# Altium PCB CW308T_Si4010.PcbDoc
Units mil, origin at the board's own origin, x right, y up, seen from the top; angles counter-clockwise.
Board outline 2060 x 2580 mil, 2 copper layers (Top Layer, Bottom Layer); 23 components, 22 nets, 131 pads, 305 vias.
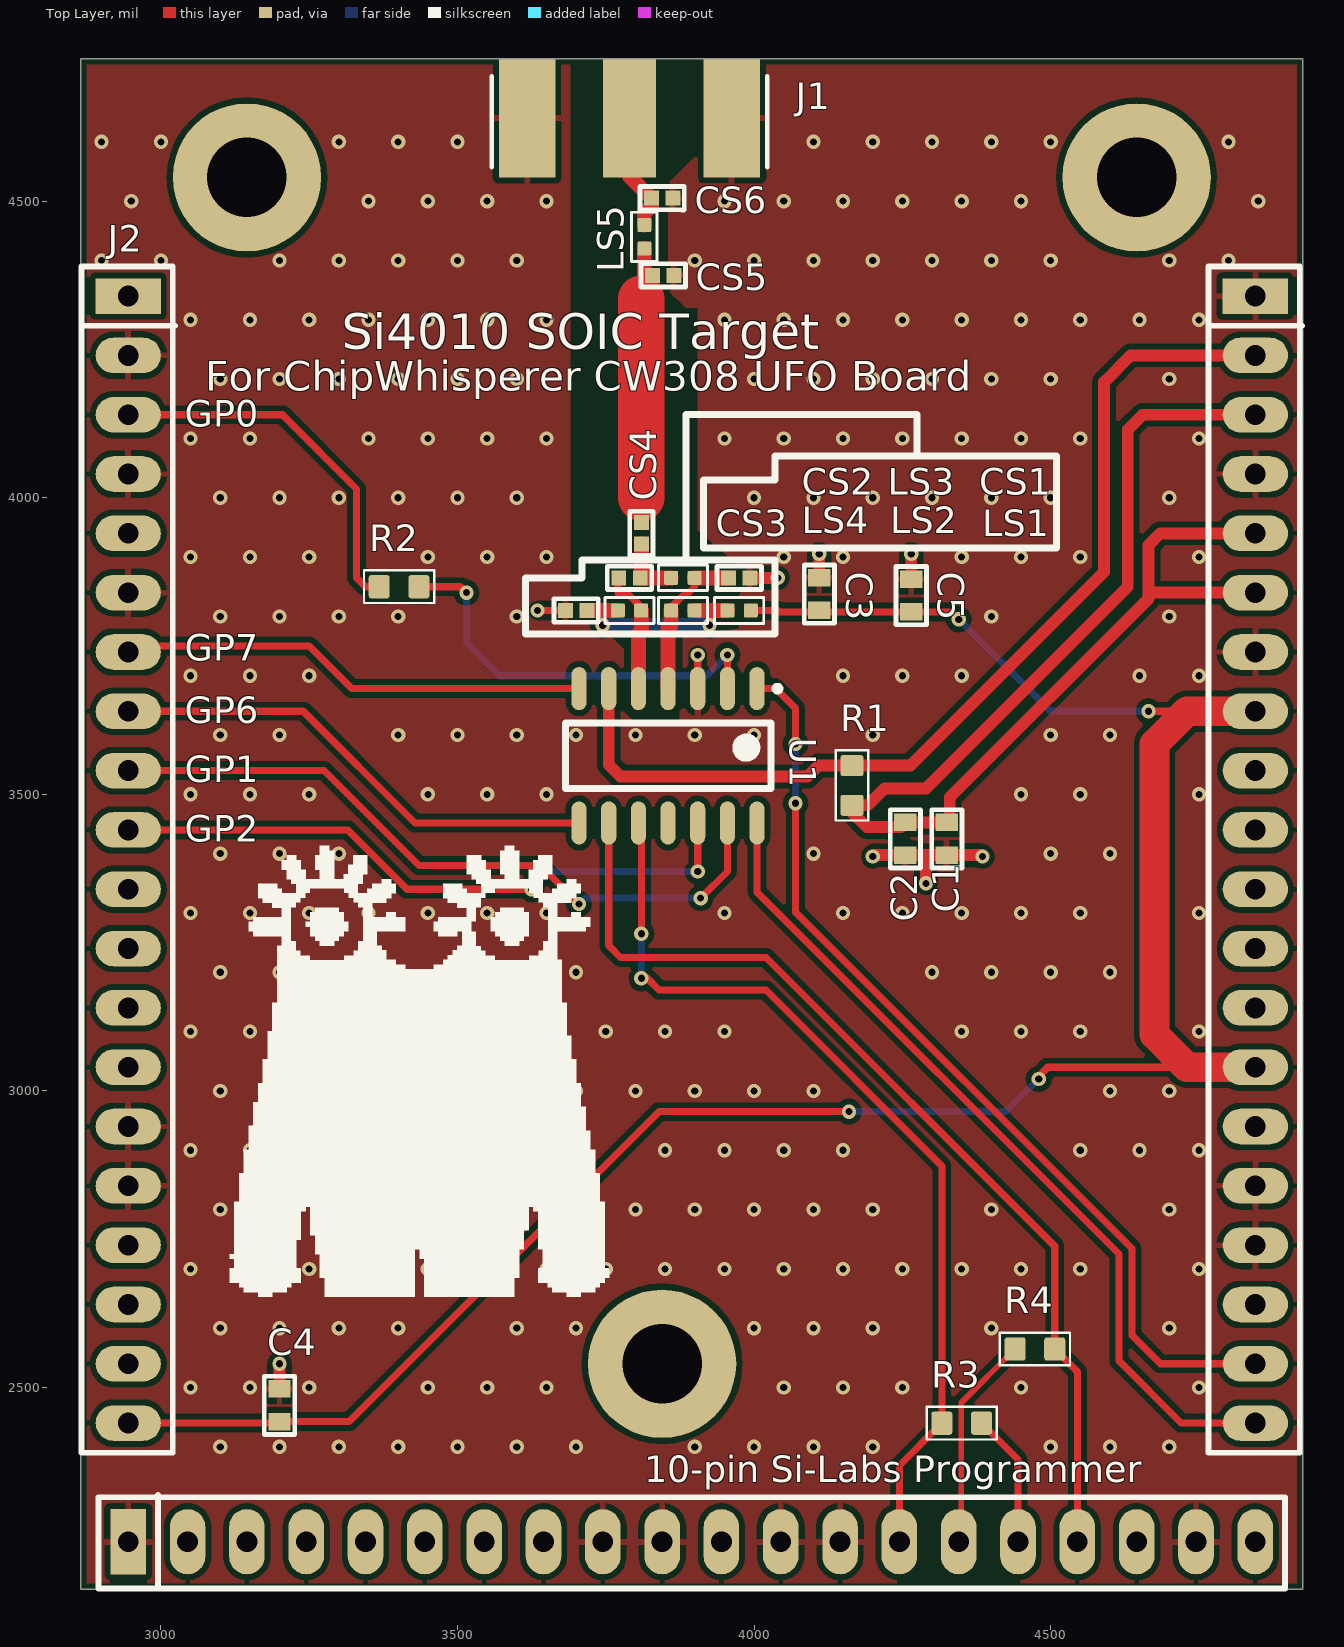
[diagram p0: Top Layer view]
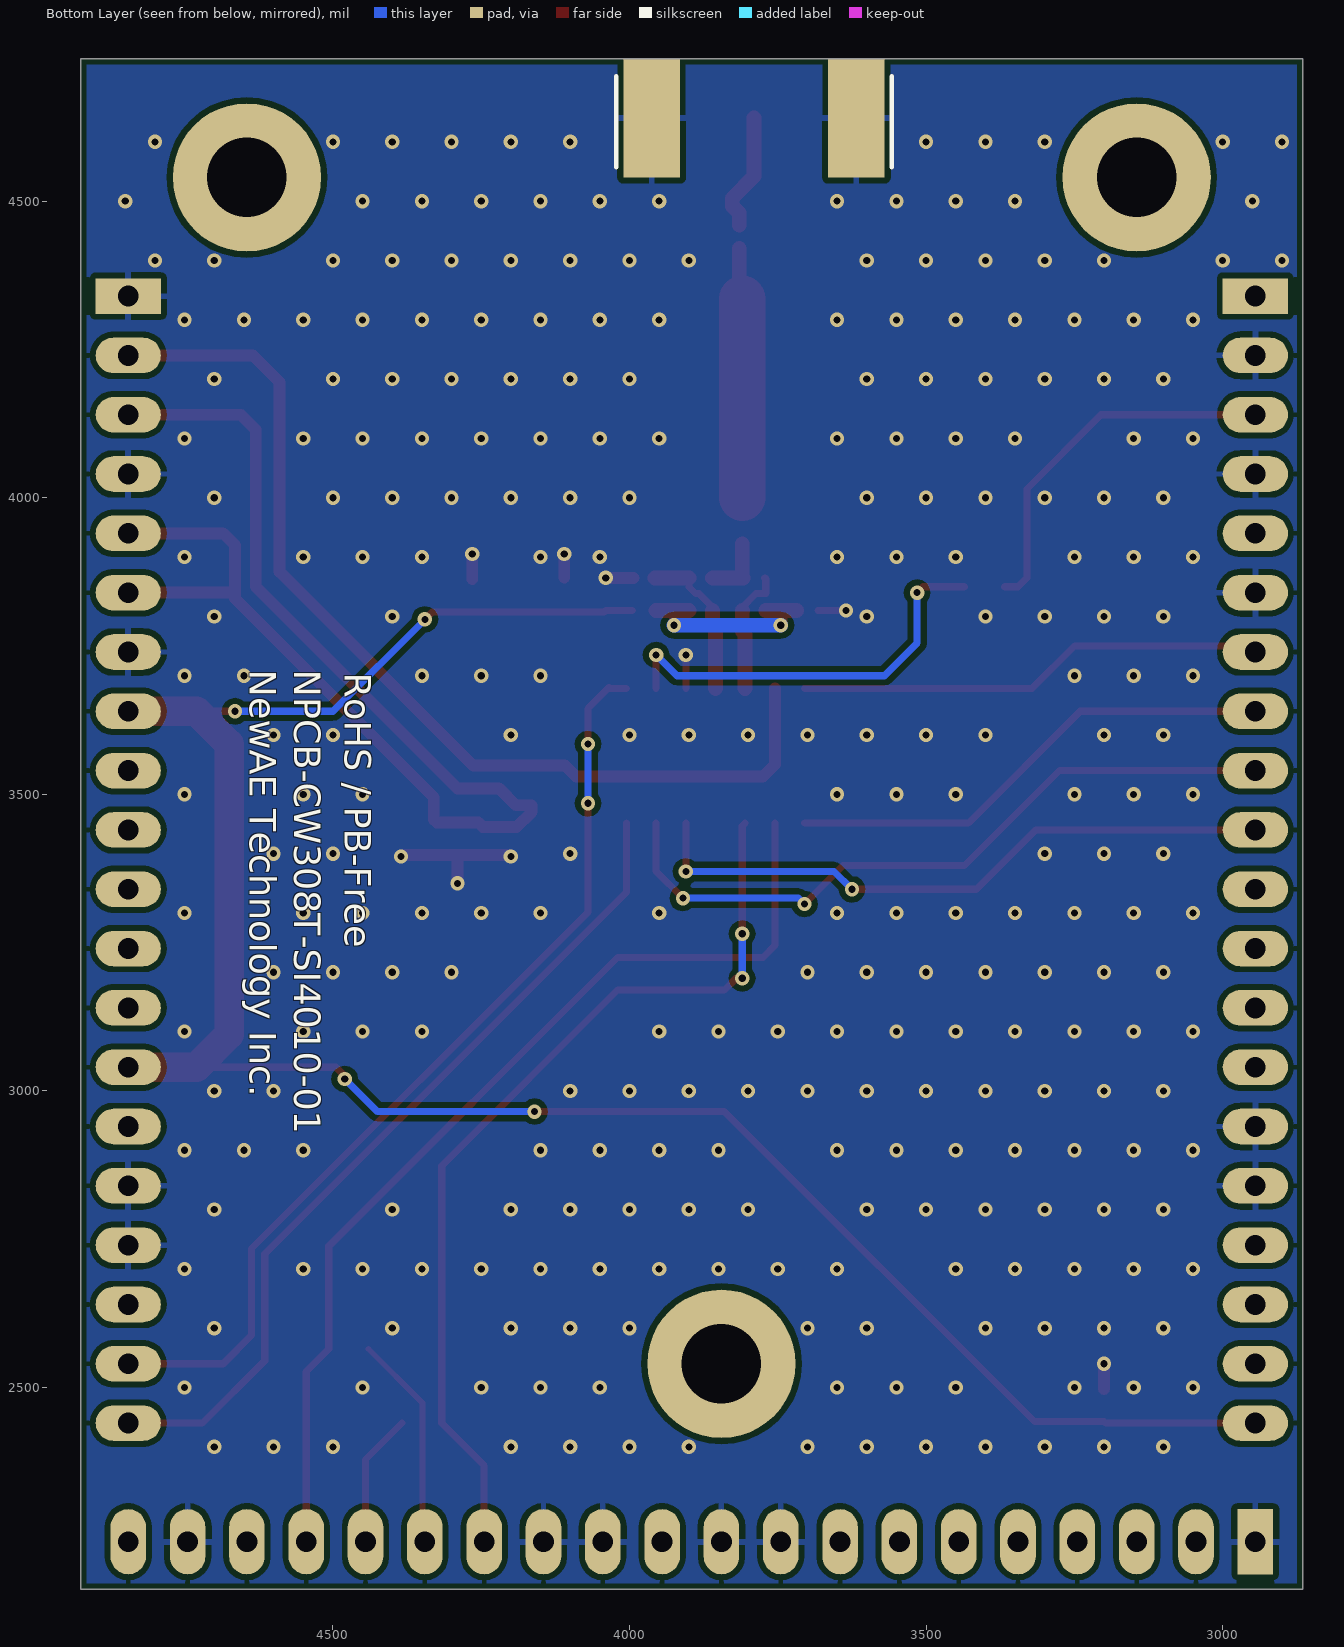
[diagram p1: Bottom Layer view, seen from below]

## Layer stack, top to bottom
Top Solder: solder mask 0.4, Solder Resist, Dk 3.5
Top Layer: signal copper 1.4
Dielectric 1: dielectric 12.6, FR-4, Dk 4.8
Bottom Layer: signal copper 1.4
Bottom Solder: solder mask 0.4, Solder Resist, Dk 3.5

## Board outline
2865,2160 2865,4740 4925,4740 4925,2160

## Design rules (kind name [scope] priority, off if disabled: settings)
BoardOutlineClearance [All] p1: gap=10 ignorepadtopadclearanceinfootprint=FALSE except(0: Arc-SplitContinuation Track-SplitContinuation SMDPad-SplitContinuation THPad-SplitContinuation Via-SplitContinuation Fill-SplitContinuation Poly-SplitContinuation Region-SplitContinuation Text-SplitContinuation)
Clearance [All] p1: gap=10 ignorepadtopadclearanceinfootprint=FALSE except(0: Arc-Hole Track-Hole SMDPad-Hole THPad-Hole Via-Hole Fill-Hole Poly-Hole Region-Hole Text-Hole)
PolygonConnect [All] p1: thpad.connectstyle=Relief thpad.reliefconductorwidth=10 thpad.reliefentries=4 thpad.polygonreliefangle="90 Angle" thpad.airgapwidth=10 smdpad.connectstyle=Relief smdpad.reliefconductorwidth=10 smdpad.reliefentries=4 smdpad.polygonreliefangle="90 Angle" smdpad.airgapwidth=10 via.connectstyle=Direct via.reliefconductorwidth=10 via.reliefentries=4 via.polygonreliefangle="90 Angle" via.airgapwidth=10
RoutingVias [All] p1: holewidth=12 width=24 viastyle="Through Hole" minholewidth=12 minwidth=24 maxholewidth=28 maxwidth=50
SolderMaskExpansion [All] p1: expansion=4
Width [All] p1: maxlimit=200 minlimit=7 preferedwidth=10 minimp=50.000000 maximp=50.000000 favimp=50.000000
30 further rules are at their usual default settings.

## Components (designator, comment, footprint, x,y, rotation, side; value= is the part's Value field where it differs from the comment)
C1 "100n" CAPC0603_M 4325,3425 r90 top
C2 "100n" CAPC0603_M 4255,3425 r90 top
C3 "100n" CAPC0603_M 4110,3837.56 r270 top
C4 "100n" CAPC0603_M 3200,2470 r270 top
C5 "100n" CAPC0603_M 4265,3835 r270 top
CS1 "DNM" CAPC0402_M 3975,3865 r0 top
CS2 "DNM" CAPC0402_M 3790,3865 r0 top
CS3 "DNM" CAPC0402_M 3700,3810 r180 top
CS4 "DNM" CAPC0402_M 3810,3940 r90 top
CS5 "DNM" CAPC0402_M 3846.89,4375 r0 top
CS6 "DNM" CAPC0402_M 3845,4505 r0 top
J1 "CON-SMA-PCBEDGE-003.062" CON-SMAM-PCB-EDGE062 3790,4640 r90 top
J2 "CW308_TARGETCON" CW308_TBOARD_CONN 2945,4340 r0 top locked
LS1 "DNM" RESC1005X40N 3975,3810 r0 top
LS2 "DNM" RESC1005X40N 3880,3810 r0 top
LS3 "DNM" RESC1005X40N 3880,3865 r180 top
LS4 "DNM" RESC1005X40N 3790,3810 r180 top
LS5 "DNM" RESC1005X40N 3815,4440 r90 top
R1 "10R" RESC1608X55N 4165,3515 r90 top
R2 "51R" RESC1608X55N 3401.54,3850 r0 top
R3 "1k" RESC1608X55N 4350,2440 r0 top
R4 "1k" RESC1608X55N 4473.46,2565 r180 top
U1 "SI4010-C2-GS" SOIC127P600X175-14M 3855,3565 r270 top

## Footprints (in the part's own frame and the unit in brackets; to place one, negate y for a bottom-side part, rotate by r counter-clockwise, add the part's x,y. Pads: shape width x height; smd on the part's side, far side on the other; paste and mask are expansions set on the pad)
CAPC0402_M [mm] "Chip Capacitor, 2-Leads, Body 0402, IPC Medium Density"
  rect 0.64x0.64 smd: 1(-0.46,0) 2(0.46,0)
  silkscreen extent -0.95,-0.5 0.95,0.5, body extent -0.55,-0.3 0.55,0.3, height 0.6
CAPC0603_M [mm]
  rect 0.75x0.95 smd: 1(-0.7,0) 2(0.7,0)
  silkscreen extent -1.25,-0.65 1.25,0.65, body extent -0.85,-0.45 0.85,0.45, height 0.9
CON-SMAM-PCB-EDGE062 [mm] "Connector, SMA Edge Mount for 0.062\" Thick Board, 5-Lead"
  rect 5.08x2.29 smd: 1(0,0)
  rect 5.08x2.415 smd: 2(0,-4.383) 5(0,4.383)
  rect 5.08x2.415 smd far side: 3(0,-4.383) 4(0,4.383)
  silkscreen extent -2.1,-5.9 1.8,5.9, body extent -2.15,-4.8 15.3,4.72, height 4.34
CW308_TBOARD_CONN [mil]
  rect 110x60 hole 35: A1(0,0) C1(1900,0)
  oval 110x60 hole 35: A2(0,-100) A3(0,-200) A4(0,-300) A5(0,-400) A6(0,-500) A7(0,-600) A8(0,-700) A9(0,-800) A10(0,-900) A11(0,-1000) A12(0,-1100) A13(0,-1200) A14(0,-1300) A15(0,-1400) A16(0,-1500) A17(0,-1600) A18(0,-1700) A19(0,-1800) A20(0,-1900) C2(1900,-100) C3(1900,-200) C4(1900,-300) C5(1900,-400) C6(1900,-500) C7(1900,-600) C8(1900,-700) C9(1900,-800) C10(1900,-900) C11(1900,-1000) C12(1900,-1100) C13(1900,-1200) C14(1900,-1300) C15(1900,-1400) C16(1900,-1500) C17(1900,-1600) C18(1900,-1700) C19(1900,-1800) C20(1900,-1900)
  rect 60x110 hole 35: B1(0,-2100)
  oval 60x110 hole 35: B2(100,-2100) B3(200,-2100) B4(300,-2100) B5(400,-2100) B6(500,-2100) B7(600,-2100) B8(700,-2100) B9(800,-2100) B10(900,-2100) B11(1000,-2100) B12(1100,-2100) B13(1200,-2100) B14(1300,-2100) B15(1400,-2100) B16(1500,-2100) B17(1600,-2100) B18(1700,-2100) B19(1800,-2100) B20(1900,-2100)
  round 250 hole 134: MH1(200,200) MH2(900,-1800) MH2(1700,200)
  silkscreen extent -79,-2179 1979,50, body extent -50,-2149 1950,50, height 48
RESC1005X40N [mm] "Chip Resistor, Body 1.0x0.5mm, EIA 0402, IPC Medium Density"
  round 0.2 on Mech15: 0(0,0)
  rrect20% 0.6x0.6 smd: 1(-0.5,0) 2(0.5,0)
  Top Layer pour cut-out: -0.325,0.375 -0.2,0.5 0.2,0.5 0.325,0.375 0.325,-0.375 0.2,-0.5 -0.2,-0.5 -0.325,-0.375
  silkscreen extent -1.05,-0.55 1.05,0.55, body extent -0.52,-0.27 0.53,0.28, height 0.4
RESC1608X55N [mm] "Chip Resistor, Body 1.6x0.8mm, EIA 0603, IPC Medium Density"
  round 0.254 on Mech15: 0(0,0)
  rrect25% 0.9x1 smd: 1(-0.85,0) 2(0.85,0)
  Top Layer pour cut-out: -0.6,0.5 -0.4,0.7 0.4,0.7 0.6,0.5 0.6,-0.5 0.4,-0.7 -0.4,-0.7 -0.6,-0.5
  silkscreen extent -1.5,-0.7 1.5,0.7, body extent -0.87,-0.47 0.88,0.48, height 0.54
SOIC127P600X175-14M [mm] "SOIC, 14-Leads, Body 8.65x3.90mm, Pitch 1.27mm, IPC Low Density"
  oval 1.85x0.65 smd: 1(-2.875,3.81) 2(-2.875,2.54) 3(-2.875,1.27) 4(-2.875,0) 5(-2.875,-1.27) 6(-2.875,-2.54) 7(-2.875,-3.81) 8(2.875,-3.81) 9(2.875,-2.54) 10(2.875,-1.27) 11(2.875,0) 12(2.875,1.27) 13(2.875,2.54) 14(2.875,3.81)
  silkscreen extent -3,-4.4 1.4,4.81, body extent -3,-4.35 3,4.35, height 1.75

## Part data
C1 C2 C3 C4 C5: library part CCHIP-100n-0603, "100n, 0603", Case-EIA=0603, Case-Metric=1608, Component Group=Capacitor, Component Type=Standard, Mounting Technology=SMT, Part Number=CCHIP-100n-0603, Pin Count=2
CS1 CS2 CS3 CS4 CS5 CS6: library part CCHIP-DNM-0402, "DNM, 0402", Case-EIA=0402, Component Group=Capacitor, Component Type=Standard, Mounting Technology=SMT, Part Number=CCHIP-DNM-0402, Pin Count=2
J1: "SMA Female Edge Mount Connector for 0.062\" Thick Board", Component Group=Connector, ComponentLink1Description="Manufacturer URL", ComponentLink1URL=http://www.linxtechnologies.com/, ComponentLink2Description=Datasheet, ComponentLink2URL=http://www.connectorcity.com/diagrams/SMA/CONSMA003.062.pdf, Component Type=Standard, DatasheetVersion="rev1.0, Aug-2006", PackageDescription="SMA Female Edge Mount Connector for 0.062\" Thick Board, 7.9 mm Body Dia.", PackageReference=CON-SMA-EDGE062, PackageVersion="rev1.0, Aug-2006", Part Number=CON-SMA-PCBEDGE-003.062, PCB_Layout="Pads complies with manufacturer's recommendation.", Pin Count=5
J2: library part CW308_TBOARD, "CW308 \"Standard\" Target Board Connector", Component Type=Standard, Mounting Technology=Through-hole, Part Number=CW308_TBOARD, Pin Count=60, Pitch=2.54mm
LS1 LS2 LS3 LS4 LS5: library part LCHIP-DNM-0402, "DNM, 0402", Case-EIA=0402, Component Group=Inductor, Component Type=Standard, Mounting Technology=SMT, Part Number=LCHIP-DNM-0402, Pin Count=2
R1: library part RCHIP-10R-0603, "10R res, 0603, 1%, 1/10W", Case-EIA=0603, Case-Metric=1608, Manufacture 1=Yageo, Manufacture Part Number 1=RC0603FR-0710RL, Rated Power=0.1W, Rated Voltage=75VDC, Supplier Part Number 1=311-10.0HRCT-ND, Temperature Range="-55C to 155C", Tolerance=1%, Component Group=Resistor, Component Type=Standard, Mounting Technology=SMT, Part Number=RCHIP-10R-0603, Pin Count=2, Supplier 1=Digi-Key
R2: library part RCHIP-51R-0603, "51R res, 0603, 1%, 1/10W", Case-EIA=0603, Case-Metric=1608, Manufacture 1=Yageo, Manufacture Part Number 1=RC0603FR-0751RL, Rated Power=0.1W, Rated Voltage=75VDC, Supplier Part Number 1=311-51.0HRCT-ND, Temperature Range="-55C to 155C", Tolerance=1%, Component Group=Resistor, Component Type=Standard, Mounting Technology=SMT, Part Number=RCHIP-51R-0603, Pin Count=2, Supplier 1=Digi-Key
R3 R4: library part RCHIP-1K-0603, "1k res, 0603, 1%, 1/10W", Case-EIA=0603, Case-Metric=1608, Manufacture 1=Yageo, Manufacture Part Number 1=RC0603FR-071KL, Rated Power=0.1W, Rated Voltage=75VDC, Supplier Part Number 1=311-1.00KHRCT-ND, Temperature Range="-55C to 155C", Tolerance=1%, Component Type=Standard, Mounting Technology=SMT, Part Number=RCHIP-1K-0603, Pin Count=2, Supplier 1=Digi-Key
U1: library part Si4010-GS, "RF Transmitter FSK, OOK 27MHz ~ 960MHz, HW-AES", Manufacture 1="Silicon Labs", Supplier Part Number 1=336-1996-5-ND, Component Type=Standard, Manufacture Part Number 1=SI4010-C2-GS, Mounting Technology=SMT, Part Number=Si4010-GS, Pin Count=14, Supplier 1=Digi-Key

## Via types
v1: diameter 24, hole 12, Top Layer to Bottom Layer, tented both sides, 280 vias
v2: diameter 24, hole 12, Top Layer to Bottom Layer, 25 vias

## Nets (pads, with @x,y where several pads share a name; then routed paths per layer and width w, separated by ;. In a path a pad name is that pad's centre, name@x,y a point inside that pad or via, vN(x,y) a via of type N, cw(c..) or ccw(c..) an arc to the next point about the centre after c; other vN are vias at no path point)
GND: C1.1 C2.1 C3.1 C4.1 C5.1 CS1.2 CS3.2 CS5.2 CS6.2 J1.2 J1.3 J1.4 J1.5 J2.A2 J2.A4 J2.A6 J2.A15 J2.A16 J2.B1 J2.B9 J2.B10 J2.B12 J2.B13 J2.B19 J2.C1 J2.C4 J2.C7 J2.C16 J2.C17 U1.3 | length 509.8
  Top Layer w12: v2(3635,3810) CS3.2 ; U1.3 v2(3905,3735)
  Top Layer w20: C4.1 v2(3200,2540) ; CS1.2 v2(4040,3865) ; C3.1 v2(4110,3905) ; v2(4200,3395) 4202.44,3397.44 C2.1 4290,3397.44 ; C5.1 v2(4265,3905) ; v2(4290,3350) 4290,3397.44 ; v2(4385,3395) 4382.56,3397.44 C1.1 4290,3397.44
  other v1: 3100,2400 3200,2400 3300,2400 3400,2400 3500,2400 3600,2400 3700,2400 3900,2400 4000,2400 4100,2400 4200,2400 4500,2400 4600,2400 4700,2400 3050,2500 3150,2500 3250,2500 3450,2500 3550,2500 3650,2500 4050,2500 4150,2500 4250,2500 4450,2500 4750,2500 3100,2600 3200,2600 3300,2600 3400,2600 3600,2600 3700,2600 4000,2600 4100,2600 4200,2600 4400,2600 4700,2600 3050,2700 3150,2700 3250,2700 3350,2700 3450,2700 3650,2700 3750,2700 3850,2700 3950,2700 4050,2700 4150,2700 4250,2700 4350,2700 4450,2700 4550,2700 4750,2700 3100,2800 3200,2800 3300,2800 3400,2800 3500,2800 3600,2800 3800,2800 3900,2800 4000,2800 4100,2800 4200,2800 4400,2800 4700,2800 3050,2900 3150,2900 3250,2900 3350,2900 3450,2900 3550,2900 3650,2900 3850,2900 3950,2900 4050,2900 4150,2900 4550,2900 4650,2900 4750,2900 3100,3000 3200,3000 3300,3000 3400,3000 3500,3000 3600,3000 3700,3000 3800,3000 3900,3000 4000,3000 4100,3000 4600,3000 4700,3000 3050,3100 3150,3100 3250,3100 3350,3100 3450,3100 3550,3100 3650,3100 3750,3100 3850,3100 3950,3100 4350,3100 4450,3100 4550,3100 4750,3100 3100,3200 3200,3200 3300,3200 3400,3200 3500,3200 3600,3200 3700,3200 4300,3200 4400,3200 4500,3200 4600,3200 3050,3300 3150,3300 3250,3300 3350,3300 3450,3300 3550,3300 3650,3300 3950,3300 4150,3300 4250,3300 4350,3300 4450,3300 4550,3300 4750,3300 3100,3400 3200,3400 3300,3400 4100,3400 4500,3400 4600,3400 3050,3500 3150,3500 3250,3500 3450,3500 3550,3500 3650,3500 4450,3500 4550,3500 4750,3500 3100,3600 3200,3600 3400,3600 3500,3600 3600,3600 3700,3600 3800,3600 3900,3600 4000,3600 4200,3600 4500,3600 4600,3600 3050,3700 3150,3700 3250,3700 4150,3700 4250,3700 4350,3700 4650,3700 4750,3700 3100,3800 3200,3800 3300,3800 3400,3800 3600,3800 4400,3800 4700,3800 3050,3900 3150,3900 3250,3900 3450,3900 3550,3900 3650,3900 4050,3900 4150,3900 4350,3900 4450,3900 4550,3900 4750,3900 3100,4000 3200,4000 3300,4000 3400,4000 3500,4000 3600,4000 4000,4000 4100,4000 4200,4000 4300,4000 4400,4000 4500,4000 4700,4000 3050,4100 3150,4100 3350,4100 3450,4100 3550,4100 3650,4100 3950,4100 4050,4100 4150,4100 4250,4100 4350,4100 4450,4100 4550,4100 4750,4100 3100,4200 3200,4200 3300,4200 3400,4200 3500,4200 3600,4200 4000,4200 4100,4200 4200,4200 4300,4200 4400,4200 4500,4200 4700,4200 3050,4300 3150,4300 3250,4300 3350,4300 3450,4300 3550,4300 3650,4300 3950,4300 4050,4300 4150,4300 4250,4300 4350,4300 4450,4300 4550,4300 4650,4300 4750,4300 2900,4400 3000,4400 3200,4400 3300,4400 3400,4400 3500,4400 3600,4400 3900,4400 4000,4400 4100,4400 4200,4400 4300,4400 4400,4400 4500,4400 4700,4400 4800,4400 2950,4500 3350,4500 3450,4500 3550,4500 3650,4500 3950,4500 4050,4500 4150,4500 4250,4500 4350,4500 4450,4500 4850,4500 2900,4600 3000,4600 3300,4600 3400,4600 3500,4600 4100,4600 4200,4600 4300,4600 4400,4600 4500,4600 4800,4600
GPIO1: J2.A7 U1.7 | length 793.9
  Top Layer w12: J2.A7 2955,3750 3250,3750 3321.81,3678.19 U1.7
GPIO2: J2.A8 U1.8 | length 838
  Top Layer w12: J2.A8 3240,3640 3428.19,3451.81 U1.8
GPIO3: J2.A9 U1.13 | length 1207.8
  Top Layer w12: J2.A9 3275,3540 3435,3380 3640,3380 v2(3705,3315) ; v2(3910,3325) 3955,3370 U1.13
  Bottom Layer w12: v2(3705,3315) 3715,3325 v2(3910,3325)
GPIO4: J2.A10 U1.12 | length 1095.7
  Top Layer w12: J2.A10 3315,3440 3415,3340 v2(3625,3340) ; v2(3905,3370) U1.12
  Bottom Layer w12: v2(3625,3340) 3655,3370 v2(3905,3370)
LED2: J2.C19 U1.1 | length 1600
  Top Layer w12: U1.1 4033.19,3678.19 4035,3680 4070,3645 v2(4070,3585) ; v2(4070,3485) 4070,3301.11 4637,2734.11 4637,2588 4685,2540 J2.C19
  Bottom Layer w12: v2(4070,3485) v2(4070,3585)
LED3: J2.C20 U1.14 | length 1433
  Top Layer w12: U1.14 4005,3335 4615,2725 4615,2545 4720,2440 J2.C20
NetC1_2: C1.2 C2.2 J2.C3 J2.C5 J2.C6 R1.1 | length 2271.6
  Top Layer w20: J2.C6 4670,3840 4665,3845 ; J2.C5 4685,3940 4665,3920 4665,3845 ; J2.C3 4655,4140 4630,4115 4630,3850 4290,3510 4220,3510 4191.54,3481.54 R1.1 4165,3470 4190,3445 4247.44,3445 C2.2 C1.2 4330,3457.56 4330,3495 4665,3830 4665,3845
NetCS1_1: CS1.1 LS2.1 LS3.1 U1.4 | length 265.7
  Top Layer w12: LS2.1 3860.32,3815.5 3883.32,3838.5 3888.82,3838.5 3899.68,3849.37 LS3.1
  Top Layer w25: U1.4 3855,3780 3860,3785 3860,3809.68 LS2.1 ; LS3.1 CS1.1
NetCS2_1: CS2.1 LS4.1 U1.5 | length 215.6
  Top Layer w12: CS2.1 3770.32,3863.43 3770.32,3838.5 3786.68,3838.5 3809.68,3815.5 LS4.1
  Top Layer w25: U1.5 3805,3770 3810,3775 3810,3809.68 LS4.1
NetCS2_2: CS2.2 CS4.1 LS3.2 | length 109.9
  Top Layer w25: CS4.1 3810,3866.89 CS2.2 LS3.2
NetCS3_1: CS3.1 LS1.1 LS2.2 LS4.2 | length 340.9
  Top Layer w12: 3740,3810 3740,3790 v2(3745,3785) ; v2(3925,3785) 3927.5,3787.5 3927.5,3810
  Top Layer w25: CS3.1 3740,3810 LS4.2 ; LS2.2 3927.5,3810 LS1.1
  Bottom Layer w25: v2(3745,3785) v2(3925,3785)
NetCS4_2: CS4.2 CS5.1 LS5.1 | length 422
  Top Layer w25: 3810,4335 3815,4340 LS5.1
  Top Layer w78.74: 3810,4000.35 3810,4335
NetCS6_1: CS6.1 J1.1 LS5.2 | length 200.5
  Top Layer w25: J1.1 3790,4541.89 CS6.1 3826.89,4491.89 3815,4480 LS5.2
NetJ2_A3: J2.A3 R2.1 | length 631.1
  Top Layer w12: J2.A3 3205,4140 3330,4015 3330,3865 3345,3850 R2.1
NetJ2_B14: J2.B14 R3.1 U1.10 | length 1564.6
  Top Layer w12: U1.10 3810,3446.81 v2(3810,3265) ; v2(3810,3190) 3820,3190 3840,3170 4020,3170 4316.54,2873.46 R3.1 4245,2368.46 J2.B14
  Bottom Layer w12: v2(3810,3190) v2(3810,3265)
NetJ2_B15: J2.B15 R4.2 | length 366.8
  Top Layer w10: J2.B15 4349.25,2240 4349.25,2474.25 R4.2
NetJ2_B16: J2.B16 R3.2 | length 225.5
  Top Layer w12: R3.2 4445,2378.46 J2.B16
NetJ2_B17: J2.B17 R4.1 U1.9 | length 1682.6
  Top Layer w12: U1.9 3755,3245 3775,3225 4020,3225 4506.93,2738.07 R4.1 4545,2526.93 J2.B17
NetJ2_C2: J2.C2 R1.2 U1.6 | length 1708
  Top Layer w20: U1.6 3755,3550 3775,3530 4090,3530 4108.46,3548.46 R1.2 4263.46,3548.46 4590,3875 4590,4195 4635,4240 J2.C2
NetR2_2: R2.2 U1.2 | length 703.2
  Top Layer w12: R2.2 3505,3850 v2(3515,3840) ; U1.2 v2(3955,3735)
  Bottom Layer w12: v2(3515,3840) 3515,3755 3570,3700 3920,3700 v2(3955,3735)
VCC: C3.2 C4.2 C5.2 J2.A20 J2.C8 J2.C14 LS1.2 | length 3717.8
  Top Layer w12: J2.A20 3197.56,2440 C4.2 3317.44,2442.44 3840,2965 v2(4160,2965) ; LS1.2 4040,3810 4042.56,3807.44 C5.2 4332.56,3807.44 v2(4345,3795) ; v2(4480,3020) 4480,3025 4495,3040 4730,3040 ; v2(4665,3640) 4730,3640
  Top Layer w50: J2.C14 4730,3040 4675,3095 4675,3585 4730,3640 J2.C8
  Bottom Layer w12: v2(4160,2965) 4425,2965 v2(4480,3020) ; v2(4345,3795) 4500,3640 v2(4665,3640)
pads on no net: J2.A1 J2.A5 J2.A11 J2.A12 J2.A13 J2.A14 J2.A17 J2.A18 J2.A19 J2.B2 J2.B3 J2.B4 J2.B5 J2.B6 J2.B7 J2.B8 J2.B11 J2.B18 J2.B20 J2.C9 J2.C10 J2.C11 J2.C12 J2.C13 J2.C15 J2.C18 J2.MH1 J2.MH2 LS1.0 LS2.0 LS3.0 LS4.0 LS5.0 R1.0 R2.0 R3.0 R4.0 U1.11

## Polygon pours and split planes (outlines as drawn)
GND on Top Layer "GNDTOP" (solid, remove dead copper, pour order 2): 2805,4800 3625,4800 3690,4735 3690,3835 3780,3745 3780,3640 3800,3620 3805,3625 3875,3625 3875,3640 3880,3645 3880,3765 3975,3780 3975,3885 3905,3945 3905,4320 3885,4320 3850,4355 3855,4360 3855,4530 3905,4580 3905,4795 4955,4795 5090,4660 5090,2005 2750,2005 2745,2010
GND on Bottom Layer "GNDBOT" (solid, pour order 4): 2760,4880 2835,4805 5120,4805 5120,2110 5080,2070 5010,2140 2675,2140 2675,3245 2650,3270

## Silkscreen, mask and mechanical layers (free items; w line width, h text height)
Top Overlay:
  drawing of 20 lines, arcs and shapes, not listed
  text "Si4010 SOIC Target" at 3305,4250 h60
  text "For ChipWhisperer CW308 UFO Board" at 3075,4180 h50
  text "GP0" at 3040,4120 h45
  text "GP7" at 3040,3725 h45
  text "GP6" at 3040,3620 h45
  text "GP1" at 3040,3520 h45
  text "GP2" at 3040,3420 h45
  text "10-pin Si-Labs Programmer" at 3815,2340 h45
Bottom Overlay:
  text "NPCB-CW308T-SI4010-01" at 4565,3710 h45 r90
  text "NewAE Technology Inc." at 4640,3710 h45 r90
  text "RoHS / PB-Free" at 4480,3705 h45 r90
Mechanical 1:
  the board outline again, w11.81